# Altium PCB ESP07_BOARD.PcbDoc
Units mm, origin at the board's own origin, x right, y up, seen from the top; angles counter-clockwise.
Board outline 152.4 x 101.6 mm, 2 copper layers (Top Layer, Bottom Layer); 4 components, 16 nets, 34 pads, 0 vias.
Unrouted connection lines stored in the file: 18.
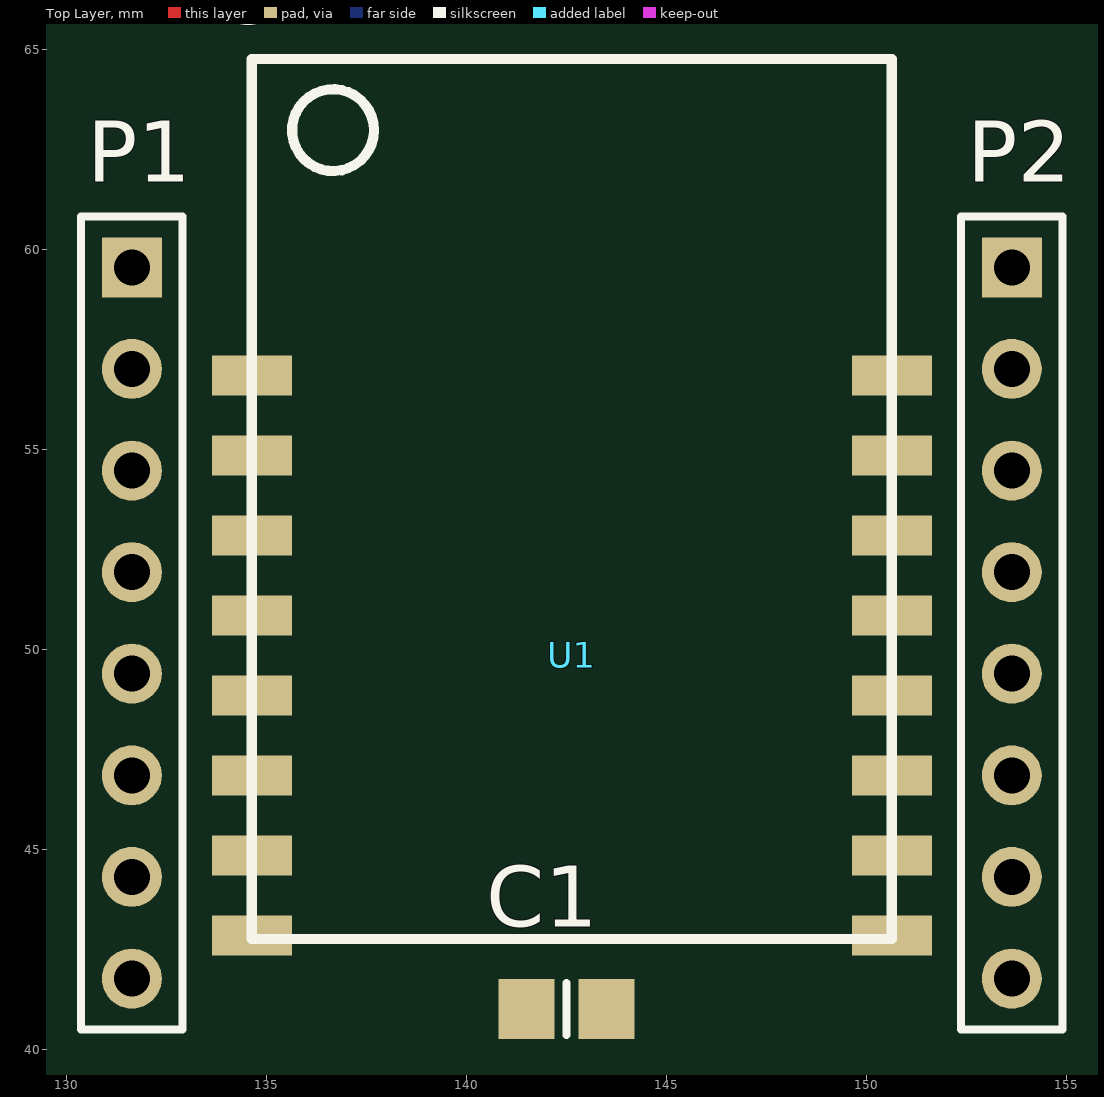
[diagram p0: Top Layer view]
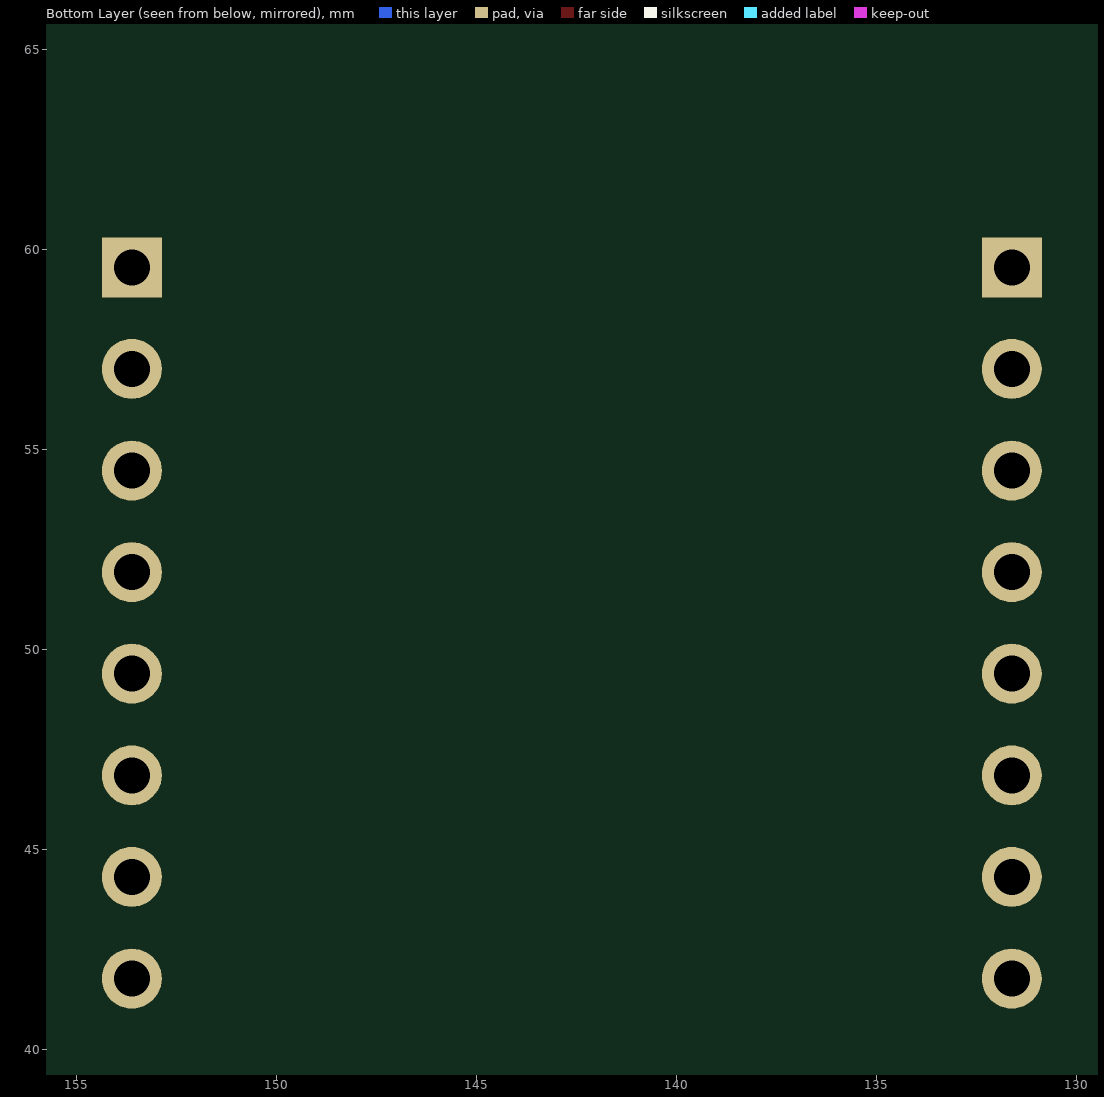
[diagram p1: Bottom Layer view, seen from below]

## Layer stack, top to bottom
Top Solder: solder mask 0.0102, Solder Resist, Dk 3.5
Top Layer: signal copper 0.0356
Dielectric 1: dielectric 0.32, FR-4, Dk 4.8
Bottom Layer: signal copper 0.0356
Bottom Solder: solder mask 0.0102, Solder Resist, Dk 3.5

## Board outline
25.4,25.4 177.8,25.4 177.8,127 25.4,127

## Design rules (kind name [scope] priority, off if disabled: settings)
Clearance [All] p1: gap=0.254
PolygonConnect [All] p1: connectstyle=Relief reliefconductorwidth=0.254 reliefentries=4 polygonreliefangle="90 Angle" airgapwidth=0.254
RoutingVias [All] p1: holewidth=0.9 width=1.7 viastyle="Through Hole" minholewidth=0.6 minwidth=1.7 maxholewidth=0.9 maxwidth=1.7
SolderMaskExpansion [All] p1: expansion=0.102
Width [All] p1: maxlimit=0.5 minlimit=0.3 preferedwidth=0.5
29 further rules are at their usual default settings.

## Components (designator, comment, footprint, x,y, rotation, side; value= is the part's Value field where it differs from the comment)
C1 "Cap" 6-0805_M 142.494,41.021 r180 top
P1 "Header 8" HDR1X8 131.622,59.563 r270 top
P2 "Header 8" HDR1X8 153.62,59.563 r270 top
U1 "ESP07" ESP07 134.62,54.864 r0 top

## Footprints (in the part's own frame and the unit in brackets; to place one, negate y for a bottom-side part, rotate by r counter-clockwise, add the part's x,y. Pads: shape width x height; smd on the part's side, far side on the other; paste and mask are expansions set on the pad)
6-0805_M [mm] "Chip Resistor, Body 2.0x1.2mm, IPC Low Density"
  rect 1.4x1.5 smd: 1(-1,0) 2(1,0)
  silkscreen extent 0,-0.65 0,0.65, body extent -1.07,-0.7 1.07,0.7, height 0.7
ESP07 [mm]
  rect 2x1 smd: 1(0,2) 2(0,0) 3(0,-2) 4(0,-4) 5(0,-6) 6(0,-8) 7(0,-10) 8(0,-12) 9(16,2) 10(16,0) 11(16,-2) 12(16,-4) 13(16,-6) 14(16,-8) 15(16,-10) 16(16,-12)
  silkscreen extent 0,-12.09 16,9.91
HDR1X8 [mm] "Connector; Header; 8 Position"
  rect 1.5x1.5 hole 0.9: 1(0,0)
  round 1.5 hole 0.9: 2(2.54,0) 3(5.08,0) 4(7.62,0) 5(10.16,0) 6(12.7,0) 7(15.24,0) 8(17.78,0)
  silkscreen extent -1.27,-1.27 19.05,1.27

## Part data
C1: "Capacitor"
P1 P2: "Header, 8-Pin"
U1: "ESP8266"

## Nets (pads, with @x,y where several pads share a name; then routed paths per layer and width w, separated by ;. In a path a pad name is that pad's centre, name@x,y a point inside that pad or via, vN(x,y) a via of type N, cw(c..) or ccw(c..) an arc to the next point about the centre after c; other vN are vias at no path point)
ADC: P1.2 U1.2
CH_PD: P1.3 U1.3
GND: C1.1 P2.8 U1.16
GPIO0: P2.5 U1.13
GPIO2: P2.6 U1.14
GPIO4: P2.3 U1.11
GPIO5: P2.4 U1.12
GPIO12: P1.6 U1.6
GPIO13: P1.7 U1.7
GPIO14: P1.5 U1.5
GPIO15: P2.7 U1.15
GPIO16: P1.4 U1.4
REST: P1.1 U1.1
RX: P2.2 U1.10
TX: P2.1 U1.9
VCC: C1.2 P1.8 U1.8